# EAGLE board panel-back (EAGLE 7.7.0)
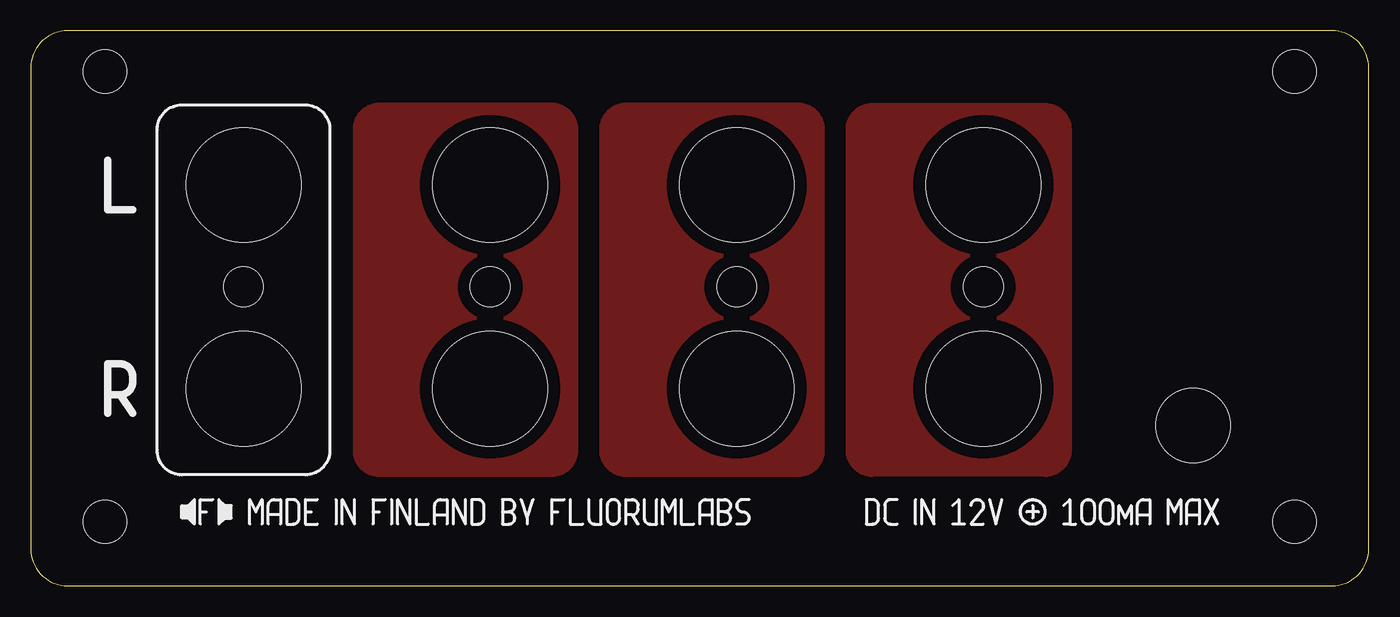
[diagram p0: board, top side]
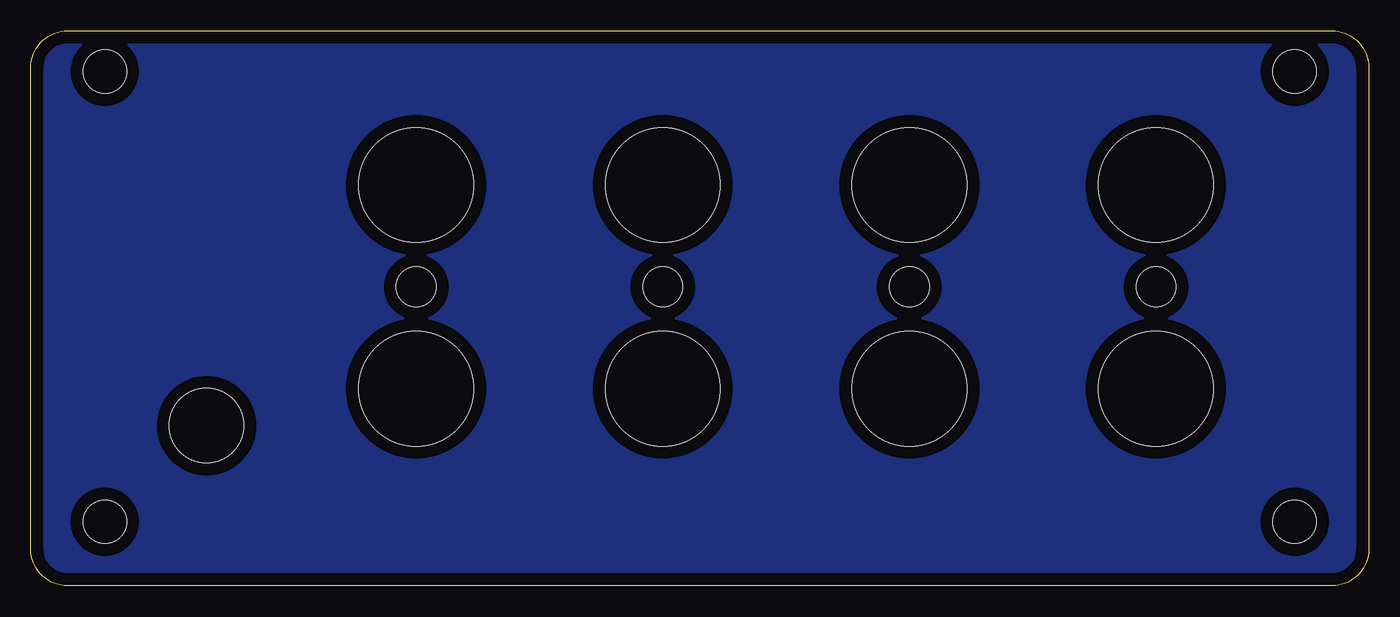
[diagram p1: board, bottom side, seen from below]

Size 108.5 x 45 mm. Coordinates in mm from the lower left corner, seen from the top.
Copper layers (1*16): Top 0.035mm / dielectric 1.5mm / Bottom 0.035mm
Design rules "default": minimum track width 10mil, minimum drill 24mil, track to track 8mil, track to pad 8mil, pad to pad 8mil, via to via 8mil, smd to smd 8mil, copper to edge 40mil, drill to drill 8mil, minimum pad ring 10mil, minimum via ring 8mil, stop-mask expansion 4mil, vias tented up to drill 0mil, thermal gap 10mil

## Footprints (pad centres in the part's own frame; a part is rotated, then mirrored left to right if it is on the bottom)
B3-SECTION = hole 3.5: 1.75,5.2; 98.25,5.2; 98.25,41.7; 1.75,41.7
PANEL-NEUTRIK-NSJ12HC = hole 9.3: 0,6.5; 0,23 | hole 3.2: 0,14.75
CUI-051 = hole 6: 0,3.5

## Placement (x,y rotation side)
E$1  [B3-SECTION]  4.25,0 0 top
E$2  [PANEL-NEUTRIK-NSJ12HC]  17.25,9.5 0 top
E$3  [PANEL-NEUTRIK-NSJ12HC]  37.25,9.5 0 top
E$4  [PANEL-NEUTRIK-NSJ12HC]  57.25,9.5 0 top
E$5  [PANEL-NEUTRIK-NSJ12HC]  77.25,9.5 0 top
E$6  [CUI-051]  94.25,9.5 0 top

## Library data of the parts
E$1-E$6 = enclosure

## Tracks (layer width: path | path; a pad name or v marks a point on that pad's centre or on a via)
S$1
  pour Top: 37.25,9 42.25,9 arc90 44.25,11 44.25,37 arc90 42.25,39 28.25,39 arc90 26.25,37 26.25,11 arc90 28.25,9
S$2
  pour Top: 57.25,9 62.25,9 arc90 64.25,11 64.25,37 arc90 62.25,39 48.25,39 arc90 46.25,37 46.25,11 arc90 48.25,9
S$3
  pour Top: 82.25,9 68.25,9 arc-90 66.25,11 66.25,37 arc-90 68.25,39 82.25,39 arc-90 84.25,37 84.25,11 arc-90
S$4
  pour Bottom: 0.25,45 108.25,45 108.25,0 0.25,0